# EAGLE board M452X (EAGLE 6.6.0)
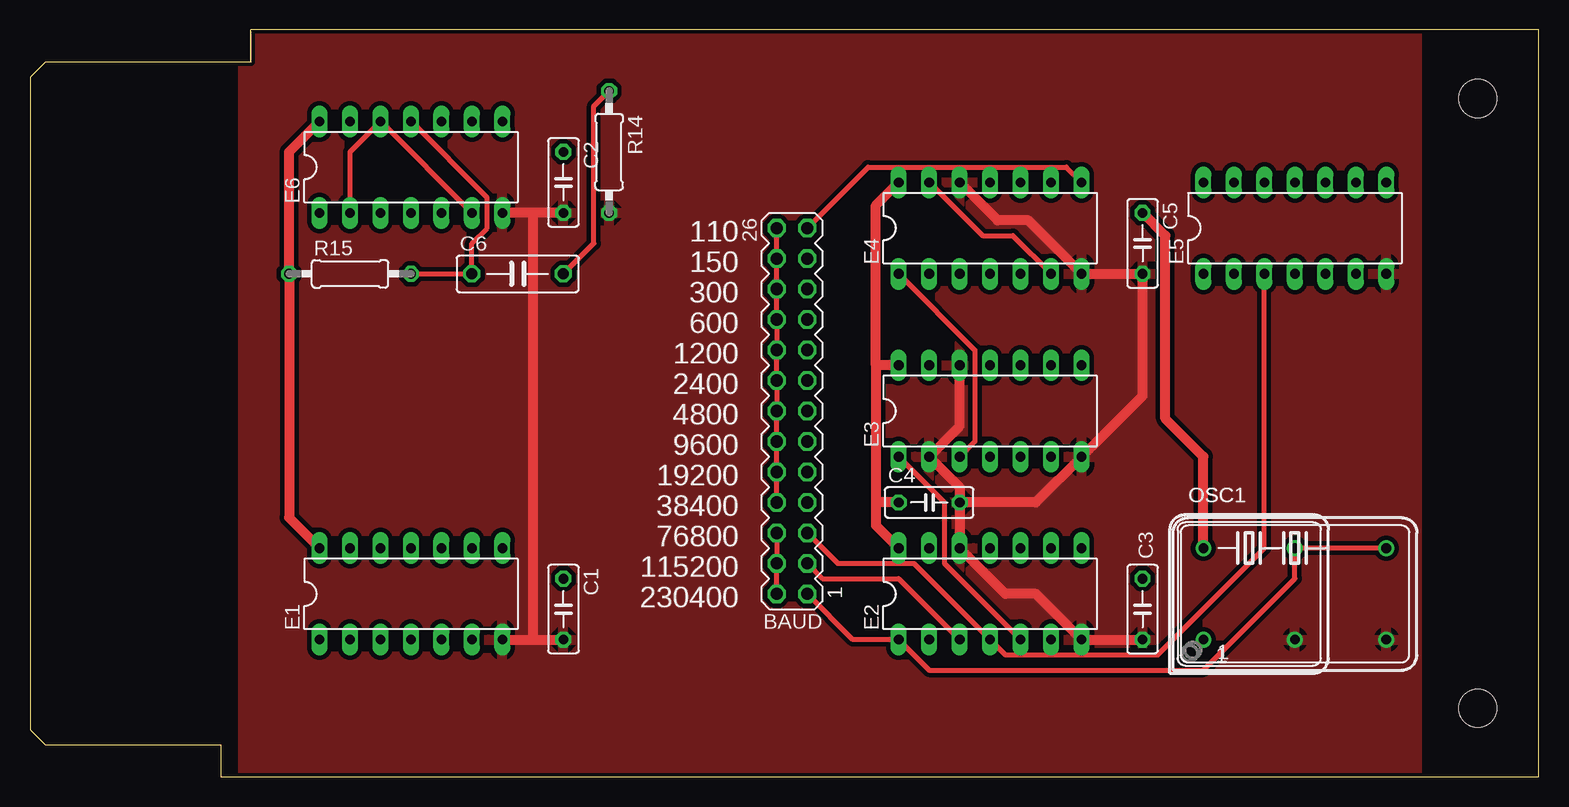
[diagram p0: board, top side]
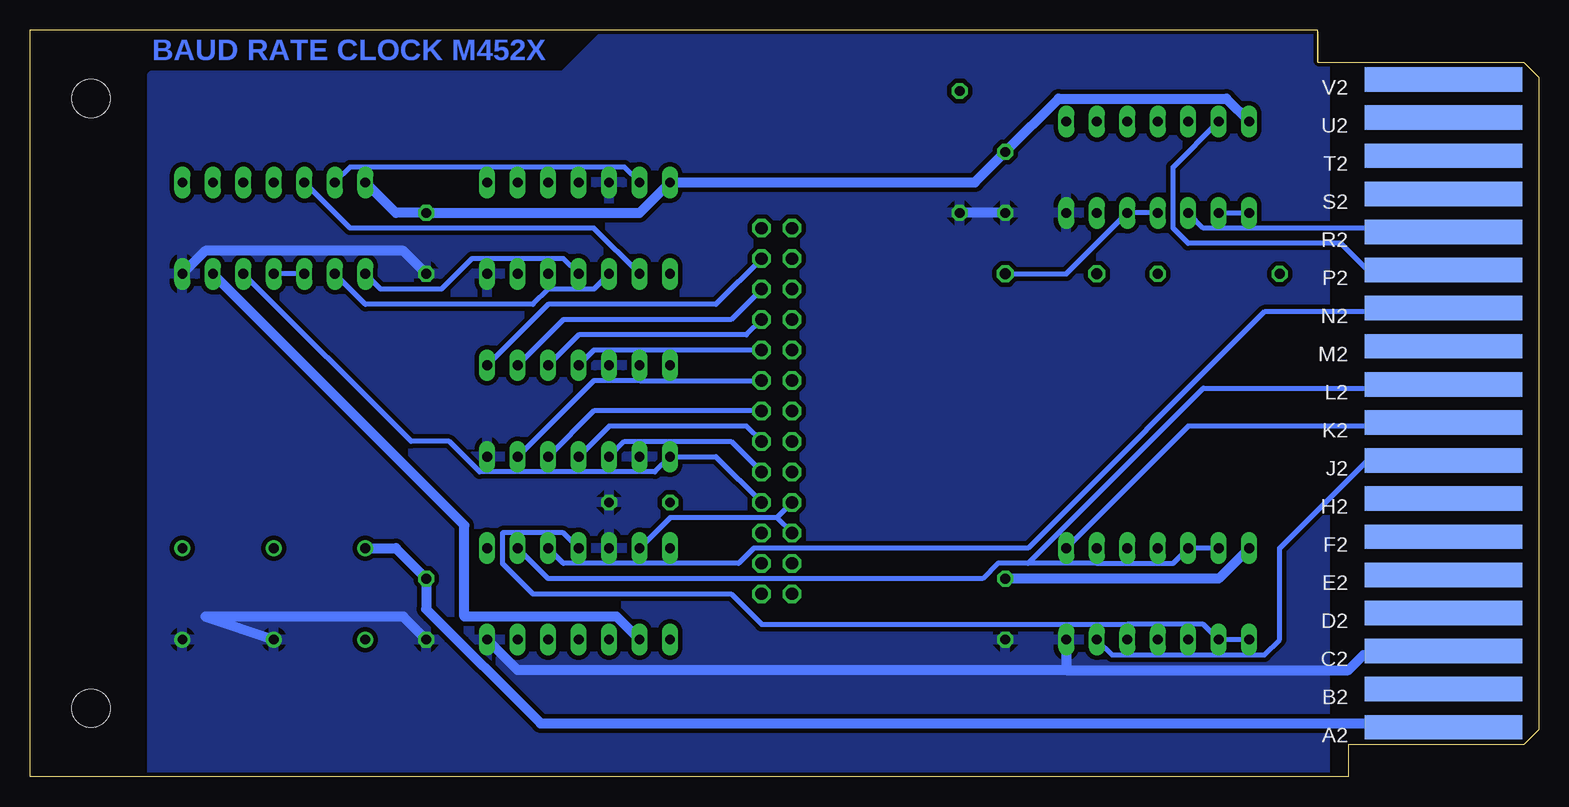
[diagram p1: board, bottom side, seen from below]

Size 125.73 x 62.23 mm. Coordinates in mm from the lower left corner, seen from the top.
Copper layers (1+16): Top 0.035mm / dielectric 1.5mm / Bottom 0.035mm
Design rules "16mils *": minimum track width 16mil, minimum drill 32mil, track to track 15mil, track to pad 10mil, pad to pad 10mil, via to via 10mil, smd to smd 10mil, copper to edge 13mil, drill to drill 10mil, minimum pad ring 10mil, minimum via ring 8mil, stop-mask expansion 0mil, vias tented up to drill 0mil, thermal gap 16mil
Net classes: 1 Supply: width 0.813 mm

## Footprints (pad centres in the part's own frame; a part is rotated, then mirrored left to right if it is on the bottom)
MA13-2 = drill 1.016 octagon: 1 -15.24,-1.27; 2 -15.24,1.27; 3 -12.7,-1.27; 4 -12.7,1.27; 5 -10.16,-1.27; 6 -10.16,1.27; 7 -7.62,-1.27; 8 -7.62,1.27; 9 -5.08,-1.27; 10 -5.08,1.27; 11 -2.54,-1.27; 12 -2.54,1.27; 13 0,-1.27; 14 0,1.27; 15 2.54,-1.27; 16 2.54,1.27; 17 5.08,-1.27; 18 5.08,1.27; 19 7.62,-1.27; 20 7.62,1.27; 21 10.16,-1.27; 22 10.16,1.27; 23 12.7,-1.27; 24 12.7,1.27; 25 15.24,-1.27; 26 15.24,1.27
C050-025X075 = drill 0.813 octagon: 1 -2.54,0; 2 2.54,0
C075-032X103 = drill 0.914 octagon: 1 -3.81,0; 2 3.81,0
DIL14 = drill 0.813 long: 1 -7.62,-3.81; 2 -5.08,-3.81; 3 -2.54,-3.81; 4 0,-3.81; 5 2.54,-3.81; 6 5.08,-3.81; 7 7.62,-3.81; 8 7.62,3.81; 9 5.08,3.81; 10 2.54,3.81; 11 0,3.81; 12 -2.54,3.81; 13 -5.08,3.81; 14 -7.62,3.81
DIL08S = drill 0.813: 1 -3.81,-3.81; 4 3.81,-3.81; 5 3.81,3.81; 8 -3.81,3.81
DIL14S = drill 0.813: 1 -7.62,-3.81; 7 7.62,-3.81; 8 7.62,3.81; 14 -7.62,3.81
0207/10 = drill 0.813 octagon: 1 -5.08,0; 2 5.08,0
SINGLE = hole 3.175: 120.65,56.515; 120.65,5.715
EDGE-CON1 = smd 13.106 x 2.032 bottom: A2 7.938,4.128; B2 7.938,7.303; C2 7.938,10.477; D2 7.938,13.652; E2 7.938,16.828; F2 7.938,20.003; H2 7.938,23.177; J2 7.938,26.352; K2 7.938,29.527; L2 7.938,32.703; M2 7.938,35.877; N2 7.938,39.053; P2 7.938,42.227; R2 7.938,45.403; S2 7.938,48.578; T2 7.938,51.752; U2 7.938,54.928; V2 7.938,58.102

## Placement (x,y rotation side)
BAUD  BAUD  [MA13-2]  63.5,30.48 90 top
C1  .01uF  [C050-025X075]  44.45,13.97 270 top
C2  .01uF  [C050-025X075]  44.45,49.53 270 top
C3  .01uF  [C050-025X075]  92.71,13.97 270 top
C4  .01uF  [C050-025X075]  74.93,22.86 0 top
C5  .01uF  [C050-025X075]  92.71,44.45 270 top
C6  470pF  [C075-032X103]  40.64,41.91 0 top
E1  7440N  [DIL14]  31.75,15.24 0 top
E2  74LS393N  [DIL14]  80.01,15.24 0 top
E3  74LS393N  [DIL14]  80.01,30.48 0 top
E4  74LS393N  [DIL14]  80.01,45.72 0 top
E5  74LS11N  [DIL14]  105.41,45.72 0 top
E6  74LS00N  [DIL14]  31.75,50.8 0 top
OSC  3.6864 MHz  [DIL08S]  101.6,15.24 0 top
OSC1  3.6864 MHz  [DIL14S]  105.41,15.24 0 top
R14  220  [0207/10]  48.26,52.07 270 top
R15  470  [0207/10]  26.67,41.91 0 top
U$1  OUTLINE-SINGLE  [SINGLE]  0,0 0 top
U$2  EDGE-1  [EDGE-CON1]  0,0 0 top

## Library data of the parts
BAUD = con-lstb; OC_FARNELL: unknown; OC_NEWARK: unknown
C1-C6 R14 R15 = rcl
E1-E6 = 74xx-us
OSC OSC1 = crystal; OC_FARNELL: unknown; OC_NEWARK: unknown
U$1 U$2 = dec-con

## Nets
!X2_RATE: E1.8 U$2.K2
!X8_RATE: E1.6 U$2.J2
BD109: BAUD.25 E4.8
BD150: BAUD.23 E3.8
BD218: E4.9
BD300: BAUD.21 E3.9
BD436: E4.10
BD600: BAUD.19 E3.10
BD873: E4.11
BD1200: BAUD.17 E3.11
BD1745: E4.6 E4.13 E5.13
BD2400: BAUD.15 E3.6 E3.13
BD4800: BAUD.13 E3.5
BD9600: BAUD.11 E3.4
BD19200: BAUD.9 E3.3 E4.1
BD38400: BAUD.7 E2.5 E3.1 E5.5
BD76800: BAUD.5 E2.4 E5.3 E5.4
BD115200: BAUD.3 E2.3
BD230400: BAUD.1 E2.1 OSC1.8 OSC.5
DIV3 [Supply]: E2.2 E5.6
DIV11: E4.2 E5.12
GND [Supply]: C1.2 C2.2 C3.2 C4.2 C5.2 E1.7 E2.7 E2.12 E3.2 E3.7 E3.12 E4.7 E4.12 E5.7 E6.7 OSC1.7 OSC.4 R14.2 U$2.C2
N$12: E6.13 U$2.P2
N$14: C6.2 E6.4 E6.5 R14.1
N$16: C6.1 E6.11 R15.2
N$17: E6.1 E6.2 E6.6 E6.12
N$21: E6.3 U$2.R2
N$24: E4.3 E5.2
N$25: E4.4 E5.1
VCC [Supply]: C1.1 C2.1 C3.1 C4.1 C5.1 E1.14 E2.14 E3.14 E4.14 E5.14 E6.14 OSC1.14 OSC.8 R15.1 U$2.A2
X2_RATE: E1.9 E1.10 E1.12 E1.13 E2.9 U$2.L2
X4_RATE: E2.10 U$2.N2
X8_RATE: E1.1 E1.2 E1.4 E1.5 E2.11
X16_RATE: BAUD.2 BAUD.4 BAUD.6 BAUD.8 BAUD.10 BAUD.12 BAUD.14 BAUD.16 BAUD.18 BAUD.20 BAUD.22 BAUD.24 BAUD.26 E2.13

## Tracks (layer width: path | path; a pad name or v marks a point on that pad's centre or on a via)
!X2_RATE
  Bottom 0.406: E1.8 29.21,29.21 8.26,29.21 U$2.K2
!X8_RATE
  Bottom 0.406: U$2.J2 14.29,26.35 21.59,19.05 21.59,11.43 22.86,10.16 35.56,10.16 E1.6
BD109
  Top 0.406: E4.8 86.36,50.8 69.85,50.8 BAUD.25
BD150
  Bottom 0.406: E3.8 82.55,39.37 68.58,39.37 BAUD.23
BD300
  Bottom 0.406: E3.9 81.28,38.1 67.31,38.1 BAUD.21
BD600
  Bottom 0.406: E3.10 80.01,36.83 66.04,36.83 BAUD.19
BD1200
  Bottom 0.406: E3.11 78.74,35.56 BAUD.17
BD1745
  Top 0.406: E4.6 81.92,45.09 79.38,45.09 E4.13
  Bottom 0.406: E5.13 99.06,50.8 76.2,50.8 E4.13
BD2400
  Bottom 0.406: E3.6 78.74,33.02 74.93,33.02 | 74.93,33.02 BAUD.15 | E3.13 74.93,33.02
BD4800
  Bottom 0.406: E3.5 78.74,30.48 BAUD.13
BD9600
  Bottom 0.406: E3.4 77.47,29.21 66.04,29.21 BAUD.11
BD19200
  Top 0.406: E4.1 78.74,35.56 78.74,27.94 E3.3
  Bottom 0.406: E3.3 76.2,27.94 67.31,27.94 BAUD.9
BD38400
  Top 0.406: E2.5 76.2,17.78 76.2,22.86 E3.1
  Bottom 0.406: E5.5 93.98,27.94 90.81,27.94 88.27,25.4 73.66,25.4 E3.1 68.58,26.67 BAUD.7
BD76800
  Top 0.406: BAUD.5 67.31,17.78 73.66,17.78 E2.4 81.28,10.16 93.98,10.16 102.87,19.05 E5.3
  Bottom 0.406: E5.3 E5.4
BD115200
  Top 0.406: E2.3 72.39,16.51 66.04,16.51 BAUD.3
BD230400
  Top 0.406: OSC1.8 OSC.5 105.41,16.51 97.79,8.89 74.93,8.89 E2.1 68.58,11.43 BAUD.1
DIV3
  Bottom 0.813: E5.6 89.54,20.95 89.54,13.34 76.84,13.34 E2.2
DIV11
  Bottom 0.406: E5.12 99.06,45.72 78.74,45.72 E4.2
GND
  Top 0.813: E4.12 80.65,46.35 83.19,46.35 E4.7 C5.2 92.71,31.75 E3.7 83.82,22.86 C4.2 | E3.12 77.47,29.21 E3.2 77.47,24.13 C4.2 | C4.2 E2.12 81.28,15.24 83.82,15.24 E2.7 C3.2 | E1.7 41.91,11.43 | 41.91,11.43 C1.2 | C2.2 41.91,46.99 | 41.91,46.99 E6.7 | 41.91,46.99 41.91,11.43
  Bottom 0.813: OSC.4 111.13,13.34 94.62,13.34 C3.2 | C2.2 R14.2 | 39.37,8.89 15.88,8.89 14.61,10.16 8.26,10.16 U$2.C2 | E1.7 39.37,8.89 | E2.7 85.09,8.89 39.37,8.89 | E5.7 111.13,43.81 94.62,43.81 C5.2
  pour Top: 115.57,62.23 115.57,0 17.78,0 17.78,62.23
  pour Bottom: 115.57,58.42 115.57,0 17.78,0 17.78,62.23 77.47,62.23 81.28,58.42
N$12
  Bottom 0.406: U$2.P2 8.89,42.23 8.89,41.91 13.97,41.91 16.51,44.45 29.21,44.45 30.48,45.72 30.48,50.8 E6.13
N$14
  Top 0.406: R14.1 46.99,55.88 46.99,44.45 C6.2
  Bottom 0.406: E6.4 E6.5 39.37,41.91 C6.2
N$16
  Top 0.406: R15.2 C6.1 36.83,44.45 38.1,45.72 38.1,48.26 E6.11
N$17
  Top 0.406: E6.2 26.67,52.07 E6.12 E6.6
  Bottom 0.406: E6.2 E6.1
N$21
  Bottom 0.406: E6.3 27.94,45.72 8.26,45.72 U$2.R2
N$24
  Bottom 0.406: E4.3 78.74,40.64 82.55,40.64 83.82,39.37 97.79,39.37 E5.2
N$25
  Bottom 0.406: E4.4 81.28,43.18 88.9,43.18 91.44,40.64 96.52,40.64 E5.1
VCC
  Top 0.813: E1.14 21.59,21.59 R15.1 21.59,52.07 E6.14 | OSC1.14 97.79,26.67 94.62,29.84 94.62,45.09 C5.1 | E2.14 70.49,20.95 70.49,22.86 | 70.49,34.29 70.49,22.86 | C4.1 70.49,22.86 | E3.14 70.49,34.29 | 70.49,34.29 70.49,47.62 E4.14
  Bottom 0.813: C1.1 26.67,16.51 E1.14 | E5.14 95.25,46.99 C5.1 74.93,46.99 E4.14 46.99,49.53 C2.1 40.01,56.52 26.04,56.52 E6.14 | OSC1.14 95.25,19.05 C3.1 92.71,13.97 83.19,4.45 8.26,4.45 U$2.A2
X2_RATE
  Bottom 0.406: E1.13 E1.12 30.48,17.78 34.29,17.78 | 36.83,17.78 42.55,17.78 | 42.55,17.78 45.09,17.78 46.36,16.51 82.55,16.51 E2.9 | E1.9 36.83,17.78 | 36.83,17.78 34.29,17.78 | 34.29,17.78 E1.10 | 42.55,17.78 27.94,32.38 8.26,32.38 U$2.L2
X4_RATE
  Bottom 0.406: U$2.N2 8.26,38.73 22.86,38.73 42.55,19.05 65.41,19.05 66.68,17.78 81.28,17.78 E2.10
X8_RATE
  Bottom 0.406: E1.1 E1.2 27.94,12.7 31.75,12.7 | E1.4 31.75,12.7 | 31.75,12.7 34.29,12.7 | E2.11 81.28,20.32 86.36,20.32 86.36,17.78 83.82,15.24 67.31,15.24 64.77,12.7 34.29,12.7 | 34.29,12.7 E1.5
X16_RATE
  Top 0.406: BAUD.26 BAUD.24 BAUD.22 BAUD.20 BAUD.18 BAUD.16 BAUD.14 BAUD.12 BAUD.10 BAUD.8 | BAUD.2 BAUD.4 BAUD.6
  Bottom 0.406: E2.13 72.39,21.59 63.5,21.59 | BAUD.6 63.5,21.59 | 63.5,21.59 BAUD.8

## Text on the board
Bottom: BAUD RATE CLOCK M452X
tNames: 110 | 150 | 300 | 600 | 1200 | 2400 | 4800 | 9600 | 19200 | 38400 | 76800 | 115200 | 230400